# Altium PCB ATMEGA8精品开发板.PcbDoc (part 2 of 2)
Units mm, origin at the board's own origin, x right, y up, seen from the top; angles counter-clockwise.
Board outline 152.4 x 101.6 mm, 2 copper layers (Top Layer, Bottom Layer); 39 components, 43 nets, 177 pads, 0 vias.
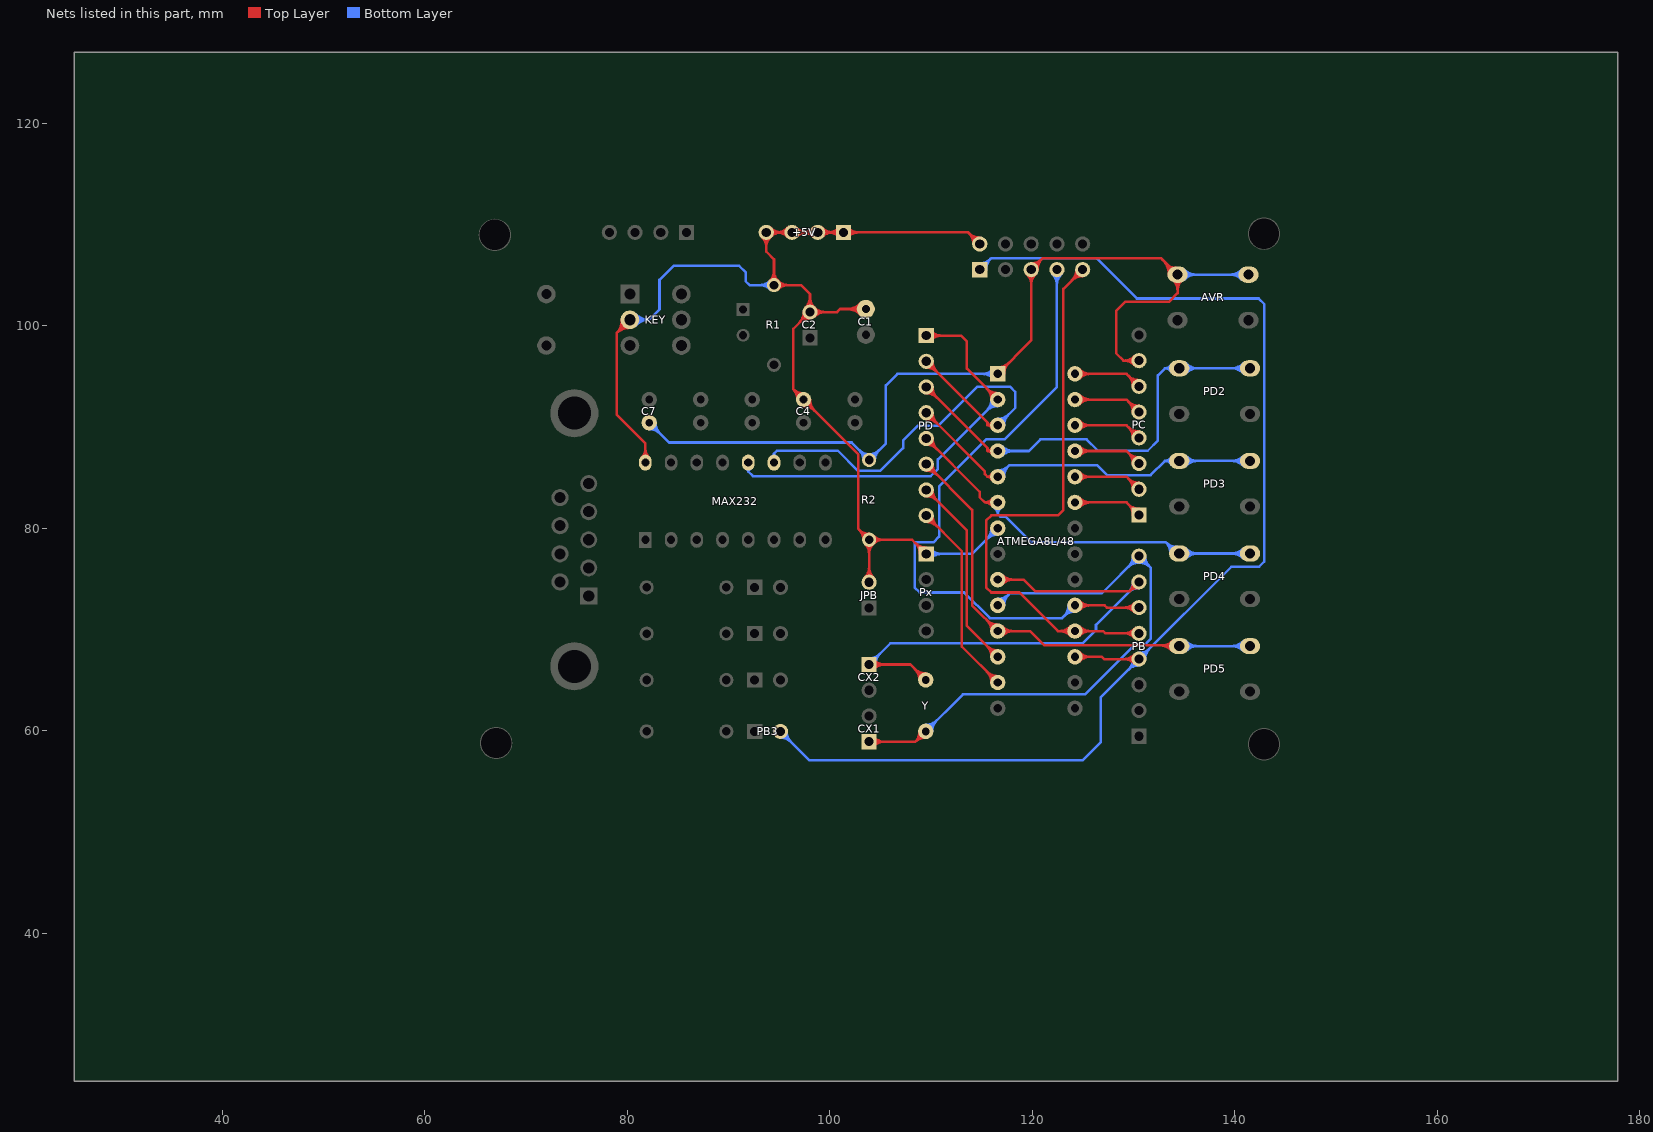
[diagram p2: the nets of this part, all layers, seen from the top]

## Nets (pads, with @x,y where several pads share a name; then routed paths per layer and width w, separated by ;. In a path a pad name is that pad's centre, name@x,y a point inside that pad or via, vN(x,y) a via of type N, cw(c..) or ccw(c..) an arc to the next point about the centre after c; other vN are vias at no path point) (continued)
PB3: ?.1 ATMEGA8L/48.17 PB3.2 PB.4 | length 144.7
  Top Layer w0.254: ATMEGA8L/48.17@124.206,67.31 126.873,67.31 127.096,67.087 PB.4@130.533,67.087 ; ATMEGA8L/48.17@124.475,67.041 cw(c125.126,66.39) 125.126,67.31 cw(c125.126,68.23) ATMEGA8L/48.17@124.475,67.579 ; ATMEGA8L/48.17@124.655,66.861 cw(c125.739,65.777) 125.739,67.31 cw(c125.739,68.843) ATMEGA8L/48.17@124.655,67.759 ; PB.4@130.092,66.646 ccw(c129.029,65.583) 129.029,67.087 ccw(c129.029,68.591) PB.4@130.092,67.528 ; PB.4@130.272,66.826 ccw(c129.642,66.196) 129.642,67.087 ccw(c129.642,67.978) PB.4@130.272,67.348
  Bottom Layer w0.254: PB3.2@95.123,59.321 cw(c95.123,57.817) 96.187,58.88 cw(c97.25,59.944) PB3.2@95.746,59.944 ; PB3.2@95.123,59.575 cw(c95.123,58.684) 95.753,59.314 cw(c96.383,59.944) PB3.2@95.492,59.944 ; PB3.2@95.123,59.944 97.993,57.074 124.968,57.074 126.746,58.852 126.746,63.3 PB.4@130.533,67.087 139.646,76.2 142.392,76.2 142.9,76.708 142.9,102.133 142.342,102.692 130.327,102.692 126.34,106.68 115.951,106.68 ?.1@114.808,105.537 ; ?.1@114.808,105.906 ccw(c114.808,106.797) 115.438,106.167 ccw(c116.068,105.537) ?.1@115.177,105.537 ; ?.1@114.808,106.16 ccw(c114.808,107.664) 115.872,106.601 ccw(c116.935,105.537) ?.1@115.431,105.537 ; PB.4@129.91,67.087 cw(c128.406,67.087) 129.469,66.023 cw(c130.533,64.96) PB.4@130.533,66.464 ; PB.4@130.164,67.087 cw(c129.273,67.087) 129.903,66.457 cw(c130.533,65.827) PB.4@130.533,66.718 ; PB.4@130.533,67.456 ccw(c130.533,68.347) 131.163,67.717 ccw(c131.793,67.087) PB.4@130.902,67.087 ; PB.4@130.533,67.71 ccw(c130.533,69.214) 131.597,68.151 ccw(c132.66,67.087) PB.4@131.156,67.087
PB4: ?.9 ATMEGA8L/48.18 PB.5 | length 71.4
  Top Layer w0.254: ATMEGA8L/48.18@123.757,69.401 ccw(c122.673,68.317) 122.673,69.85 ccw(c122.673,71.383) ATMEGA8L/48.18@123.757,70.299 ; ATMEGA8L/48.18@123.937,69.581 ccw(c123.286,68.93) 123.286,69.85 ccw(c123.286,70.77) ATMEGA8L/48.18@123.937,70.119 ; ?.9@124.345,105.537 cw(c122.841,105.537) 123.904,104.473 cw(c124.968,103.41) ?.9@124.968,104.914 ; ATMEGA8L/48.18@124.475,69.581 cw(c125.126,68.93) 125.126,69.85 cw(c125.126,70.77) ATMEGA8L/48.18@124.475,70.119 ; ?.9@124.599,105.537 cw(c123.708,105.537) 124.338,104.907 cw(c124.968,104.277) ?.9@124.968,105.168 ; ATMEGA8L/48.18@124.655,69.401 cw(c125.739,68.317) 125.739,69.85 cw(c125.739,71.383) ATMEGA8L/48.18@124.655,70.299 ; ?.9@124.968,105.537 123.063,103.632 123.063,81.788 122.555,81.28 115.951,81.28 115.443,80.772 115.443,74.168 115.951,73.66 118.72,73.66 122.53,69.85 ATMEGA8L/48.18@124.206,69.85 127,69.85 127.223,69.627 PB.5@130.533,69.627 ; PB.5@130.092,69.186 ccw(c129.029,68.123) 129.029,69.627 ccw(c129.029,71.131) PB.5@130.092,70.068 ; PB.5@130.272,69.366 ccw(c129.642,68.736) 129.642,69.627 ccw(c129.642,70.518) PB.5@130.272,69.888
PB5: ?.7 ATMEGA8L/48.19 PB.6 | length 78.6
  Top Layer w0.254: ATMEGA8L/48.19@124.206,72.39 127.127,72.39 127.35,72.167 PB.6@130.533,72.167 ; ATMEGA8L/48.19@124.475,72.121 cw(c125.126,71.47) 125.126,72.39 cw(c125.126,73.31) ATMEGA8L/48.19@124.475,72.659 ; ATMEGA8L/48.19@124.655,71.941 cw(c125.739,70.857) 125.739,72.39 cw(c125.739,73.923) ATMEGA8L/48.19@124.655,72.839 ; PB.6@130.092,71.726 ccw(c129.029,70.663) 129.029,72.167 ccw(c129.029,73.671) PB.6@130.092,72.608 ; PB.6@130.272,71.906 ccw(c129.642,71.276) 129.642,72.167 ccw(c129.642,73.058) PB.6@130.272,72.428
  Bottom Layer w0.254: ?.7@121.987,105.096 cw(c120.924,104.033) 122.428,104.033 cw(c123.932,104.033) ?.7@122.869,105.096 ; ?.7@122.167,105.276 cw(c121.537,104.646) 122.428,104.646 cw(c123.319,104.646) ?.7@122.689,105.276 ; ?.7@122.428,105.537 122.428,93.955 117.246,88.773 115.443,88.773 110.795,84.125 110.795,79.172 110.236,78.613 108.382,78.613 108.382,74.168 108.89,73.66 113.259,73.66 115.799,71.12 122.936,71.12 ATMEGA8L/48.19@124.206,72.39 ; ATMEGA8L/48.19@123.571,72.39 cw(c122.038,72.39) 123.122,71.306 cw(c124.206,70.222) ATMEGA8L/48.19@124.206,71.755 ; ATMEGA8L/48.19@123.825,72.39 cw(c122.905,72.39) 123.556,71.74 cw(c124.206,71.089) ATMEGA8L/48.19@124.206,72.009
PB6: ATMEGA8L/48.9 CX2.1 PB.7 Y.2 | length 73.3
  Top Layer w0.254: CX2.1@103.886,66.548 107.95,66.548 Y.2@109.474,65.024 ; CX2.1@104.147,66.287 cw(c104.777,65.657) 104.777,66.548 cw(c104.777,67.439) CX2.1@104.147,66.809 ; CX2.1@104.327,66.107 cw(c105.39,65.044) 105.39,66.548 cw(c105.39,68.052) CX2.1@104.327,66.989 ; Y.2@108.839,65.024 ccw(c107.306,65.024) 108.39,66.108 ccw(c109.474,67.192) Y.2@109.474,65.659 ; Y.2@109.093,65.024 ccw(c108.173,65.024) 108.824,65.674 ccw(c109.474,66.325) Y.2@109.474,65.405 ; ATMEGA8L/48.9@116.586,74.93 119.126,74.93 120.269,73.787 129.613,73.787 PB.7@130.533,74.707 ; ATMEGA8L/48.9@116.855,74.661 cw(c117.506,74.01) 117.506,74.93 cw(c117.506,75.85) ATMEGA8L/48.9@116.855,75.199 ; ATMEGA8L/48.9@117.035,74.481 cw(c118.119,73.397) 118.119,74.93 cw(c118.119,76.463) ATMEGA8L/48.9@117.035,75.379 ; PB.7@129.914,74.64 cw(c128.873,74.527) 129.613,73.787 cw(c130.353,73.047) PB.7@130.466,74.088 ; PB.7@130.166,74.667 cw(c129.55,74.601) 129.988,74.162 cw(c130.427,73.724) PB.7@130.493,74.34
  Bottom Layer w0.254: CX2.1@103.886,66.548 105.969,68.631 124.968,68.631 126.289,69.952 126.289,70.463 PB.7@130.533,74.707 ; CX2.1@103.886,66.917 ccw(c103.886,67.808) 104.516,67.178 ccw(c105.146,66.548) CX2.1@104.255,66.548 ; CX2.1@103.886,67.171 ccw(c103.886,68.675) 104.95,67.612 ccw(c106.013,66.548) CX2.1@104.509,66.548 ; PB.7@129.91,74.707 cw(c128.406,74.707) 129.469,73.643 cw(c130.533,72.58) PB.7@130.533,74.084 ; PB.7@130.164,74.707 cw(c129.273,74.707) 129.903,74.077 cw(c130.533,73.447) PB.7@130.533,74.338
PB7: ATMEGA8L/48.10 CX1.1 PB.8 Y.1 | length 79.1
  Top Layer w0.254: CX1.1@103.886,58.928 108.458,58.928 ; CX1.1@104.147,58.667 cw(c104.777,58.037) 104.777,58.928 cw(c104.777,59.819) CX1.1@104.147,59.189 ; CX1.1@104.327,58.487 cw(c105.39,57.424) 105.39,58.928 cw(c105.39,60.432) CX1.1@104.327,59.369 ; Y.1@108.84,59.914 cw(c107.533,59.853) 108.458,58.928 ; Y.1@109.093,59.926 cw(c108.31,59.889) 108.864,59.334 cw(c109.419,58.78) Y.1@109.456,59.563 ; Y.1@109.444,59.31 ccw(c109.383,58.003) 108.458,58.928 ; Y.1@109.474,59.944 108.458,58.928
  Bottom Layer w0.254: Y.1@109.474,59.944 113.132,63.602 125.197,63.602 130.073,68.478 131.064,68.478 131.674,69.088 131.674,76.106 PB.8@130.533,77.247 126.87,73.584 117.78,73.584 ATMEGA8L/48.10@116.586,72.39 ; Y.1@109.474,60.325 ccw(c109.474,61.245) 110.124,60.594 ccw(c110.775,59.944) Y.1@109.855,59.944 ; Y.1@109.474,60.579 ccw(c109.474,62.112) 110.558,61.028 ccw(c111.642,59.944) Y.1@110.109,59.944 ; ATMEGA8L/48.10@116.586,72.771 ccw(c116.586,73.691) 117.236,73.04 ccw(c117.887,72.39) ATMEGA8L/48.10@116.967,72.39 ; ATMEGA8L/48.10@116.586,73.025 ccw(c116.586,74.558) 117.67,73.474 ccw(c118.754,72.39) ATMEGA8L/48.10@117.221,72.39 ; PB.8@129.91,77.247 cw(c128.406,77.247) 129.469,76.183 cw(c130.533,75.12) 130.533,76.624 cw(c130.533,75.12) 131.597,76.183 cw(c132.66,77.247) PB.8@131.156,77.247 ; PB.8@130.164,77.247 cw(c129.273,77.247) 129.903,76.617 cw(c130.533,75.987) 130.533,76.878 cw(c130.533,75.987) 131.163,76.617 cw(c131.793,77.247) PB.8@130.902,77.247
PC0: ATMEGA8L/48.23 PC.1 | length 14.5
  Top Layer w0.254: ATMEGA8L/48.23@124.206,82.55 129.294,82.55 PC.1@130.533,81.311 ; ATMEGA8L/48.23@124.475,82.281 cw(c125.126,81.63) 125.126,82.55 cw(c125.126,83.47) ATMEGA8L/48.23@124.475,82.819 ; ATMEGA8L/48.23@124.655,82.101 cw(c125.739,81.017) 125.739,82.55 cw(c125.739,84.083) ATMEGA8L/48.23@124.655,82.999 ; PC.1@129.91,81.311 ccw(c128.406,81.311) 129.469,82.375 ccw(c130.533,83.438) PC.1@130.533,81.934 ; PC.1@130.164,81.311 ccw(c129.273,81.311) 129.903,81.941 ccw(c130.533,82.571) PC.1@130.533,81.68
PC1: ATMEGA8L/48.24 PC.2 | length 14.5
  Top Layer w0.254: ATMEGA8L/48.24@124.206,85.09 129.294,85.09 PC.2@130.533,83.851 ; ATMEGA8L/48.24@124.475,84.821 cw(c125.126,84.17) 125.126,85.09 cw(c125.126,86.01) ATMEGA8L/48.24@124.475,85.359 ; ATMEGA8L/48.24@124.655,84.641 cw(c125.739,83.557) 125.739,85.09 cw(c125.739,86.623) ATMEGA8L/48.24@124.655,85.539 ; PC.2@129.91,83.851 ccw(c128.406,83.851) 129.469,84.915 ccw(c130.533,85.978) PC.2@130.533,84.474 ; PC.2@130.164,83.851 ccw(c129.273,83.851) 129.903,84.481 ccw(c130.533,85.111) PC.2@130.533,84.22
PC2: ATMEGA8L/48.25 PC.3 | length 14.5
  Top Layer w0.254: ATMEGA8L/48.25@124.206,87.63 129.294,87.63 PC.3@130.533,86.391 ; ATMEGA8L/48.25@124.475,87.361 cw(c125.126,86.71) 125.126,87.63 cw(c125.126,88.55) ATMEGA8L/48.25@124.475,87.899 ; ATMEGA8L/48.25@124.655,87.181 cw(c125.739,86.097) 125.739,87.63 cw(c125.739,89.163) ATMEGA8L/48.25@124.655,88.079 ; PC.3@129.91,86.391 ccw(c128.406,86.391) 129.469,87.455 ccw(c130.533,88.518) PC.3@130.533,87.014 ; PC.3@130.164,86.391 ccw(c129.273,86.391) 129.903,87.021 ccw(c130.533,87.651) PC.3@130.533,86.76
PC3: ATMEGA8L/48.26 PC.4 | length 14.5
  Top Layer w0.254: ATMEGA8L/48.26@124.206,90.17 129.294,90.17 PC.4@130.533,88.931 ; ATMEGA8L/48.26@124.475,89.901 cw(c125.126,89.25) 125.126,90.17 cw(c125.126,91.09) ATMEGA8L/48.26@124.475,90.439 ; ATMEGA8L/48.26@124.655,89.721 cw(c125.739,88.637) 125.739,90.17 cw(c125.739,91.703) ATMEGA8L/48.26@124.655,90.619 ; PC.4@129.91,88.931 ccw(c128.406,88.931) 129.469,89.995 ccw(c130.533,91.058) PC.4@130.533,89.554 ; PC.4@130.164,88.931 ccw(c129.273,88.931) 129.903,89.561 ccw(c130.533,90.191) PC.4@130.533,89.3
PC4: ATMEGA8L/48.27 PC.5 | length 14.5
  Top Layer w0.254: ATMEGA8L/48.27@124.206,92.71 129.294,92.71 PC.5@130.533,91.471 ; ATMEGA8L/48.27@124.475,92.441 cw(c125.126,91.79) 125.126,92.71 cw(c125.126,93.63) ATMEGA8L/48.27@124.475,92.979 ; ATMEGA8L/48.27@124.655,92.261 cw(c125.739,91.177) 125.739,92.71 cw(c125.739,94.243) ATMEGA8L/48.27@124.655,93.159 ; PC.5@129.91,91.471 ccw(c128.406,91.471) 129.469,92.535 ccw(c130.533,93.598) PC.5@130.533,92.094 ; PC.5@130.164,91.471 ccw(c129.273,91.471) 129.903,92.101 ccw(c130.533,92.731) PC.5@130.533,91.84
PC5: ATMEGA8L/48.28 PC.6 | length 14.5
  Top Layer w0.254: ATMEGA8L/48.28@124.206,95.25 129.294,95.25 PC.6@130.533,94.011 ; ATMEGA8L/48.28@124.475,94.981 cw(c125.126,94.33) 125.126,95.25 cw(c125.126,96.17) ATMEGA8L/48.28@124.475,95.519 ; ATMEGA8L/48.28@124.655,94.801 cw(c125.739,93.717) 125.739,95.25 cw(c125.739,96.783) ATMEGA8L/48.28@124.655,95.699 ; PC.6@129.91,94.011 ccw(c128.406,94.011) 129.469,95.075 ccw(c130.533,96.138) PC.6@130.533,94.634 ; PC.6@130.164,94.011 ccw(c129.273,94.011) 129.903,94.641 ccw(c130.533,95.271) PC.6@130.533,94.38
PC6: ?.5 ATMEGA8L/48.1 AVR.1 C7.1 PC.7 R2.1 | length 138.2
  Top Layer w0.254: ATMEGA8L/48.1@116.586,95.25 119.888,98.552 ?.5@119.888,105.537 121.031,106.68 132.707,106.68 AVR.1@134.343,105.044 134.343,103.228 133.477,102.362 129.159,102.362 128.27,101.473 128.27,97.282 129.001,96.551 PC.7@130.533,96.551 ; ATMEGA8L/48.1@116.586,95.631 ccw(c116.586,96.551) 117.236,95.9 ccw(c117.887,95.25) ATMEGA8L/48.1@116.967,95.25 ; ATMEGA8L/48.1@116.586,95.885 ccw(c116.586,97.418) 117.67,96.334 ccw(c118.754,95.25) ATMEGA8L/48.1@117.221,95.25 ; ?.5@119.447,105.096 cw(c118.384,104.033) 119.888,104.033 cw(c121.392,104.033) ?.5@120.329,105.096 ; ?.5@119.627,105.276 cw(c118.997,104.646) 119.888,104.646 cw(c120.779,104.646) ?.5@120.149,105.276 ; ?.5@119.888,105.906 ccw(c119.888,106.797) 120.518,106.167 ccw(c121.148,105.537) ?.5@120.257,105.537 ; ?.5@119.888,106.16 ccw(c119.888,107.664) 120.952,106.601 ccw(c122.015,105.537) ?.5@120.511,105.537 ; PC.7@130.092,96.11 ccw(c129.029,95.047) 129.029,96.551 ccw(c129.029,98.055) PC.7@130.092,96.992 ; PC.7@130.272,96.29 ccw(c129.642,95.66) 129.642,96.551 ccw(c129.642,97.442) PC.7@130.272,96.812 ; 132.853,106.534 cw(c131.362,105.044) AVR.1@133.47,105.044 ; 133.286,106.1 cw(c132.23,105.044) AVR.1@133.724,105.044 ; 133.336,106.051 ccw(c134.143,106.859) AVR.1@134.143,105.717 ; AVR.1@133.867,104.568 cw(c132.718,103.419) 134.343,103.419 cw(c135.968,103.419) AVR.1@134.819,104.568 ; AVR.1@134.047,104.748 cw(c133.331,104.032) 134.343,104.032 cw(c135.355,104.032) AVR.1@134.639,104.748
  Bottom Layer w0.254: C7.1@82.169,89.789 cw(c82.169,88.256) 83.253,89.34 cw(c84.337,90.424) C7.1@82.804,90.424 ; C7.1@82.169,90.043 cw(c82.169,89.123) 82.819,89.774 cw(c83.47,90.424) C7.1@82.55,90.424 ; C7.1@82.169,90.424 84.125,88.468 102.159,88.468 R2.1@103.886,86.741 105.537,88.392 105.537,94.107 106.68,95.25 ATMEGA8L/48.1@116.586,95.25 ; R2.1@103.313,86.741 ccw(c101.93,86.741) 102.908,87.719 ccw(c103.886,88.697) 103.886,87.314 ccw(c103.886,88.697) 104.864,87.719 ccw(c105.842,86.741) R2.1@104.459,86.741 ; R2.1@103.567,86.741 ccw(c102.797,86.741) 103.341,87.286 ccw(c103.886,87.83) 103.886,87.06 ccw(c103.886,87.83) 104.431,87.286 ccw(c104.975,86.741) R2.1@104.205,86.741 ; ATMEGA8L/48.1@116.137,94.801 ccw(c115.053,93.717) 115.053,95.25 ccw(c115.053,96.783) ATMEGA8L/48.1@116.137,95.699 ; ATMEGA8L/48.1@116.317,94.981 ccw(c115.666,94.33) 115.666,95.25 ccw(c115.666,96.17) ATMEGA8L/48.1@116.317,95.519 ; AVR.1@134.343,105.044 AVR.1@141.343,105.044 ; AVR.1@134.839,104.748 cw(c135.555,104.032) 135.555,105.044 cw(c135.555,106.055) AVR.1@134.839,105.34 ; AVR.1@135.019,104.568 cw(c136.168,103.419) 136.168,105.044 cw(c136.168,106.669) AVR.1@135.019,105.52 ; AVR.1@140.667,104.568 ccw(c139.518,103.419) 139.518,105.044 ccw(c139.518,106.669) AVR.1@140.667,105.52 ; AVR.1@140.847,104.748 ccw(c140.131,104.032) 140.131,105.044 ccw(c140.131,106.055) AVR.1@140.847,105.34
PD0: ATMEGA8L/48.2 MAX232.12 PD.1 | length 53.4
  Top Layer w0.254: PD.1@109.526,99.029 112.934,99.029 113.538,98.425 113.538,95.758 ATMEGA8L/48.2@116.586,92.71 ; PD.1@109.787,98.768 cw(c110.417,98.138) 110.417,99.029 cw(c110.417,99.92) PD.1@109.787,99.29 ; PD.1@109.967,98.588 cw(c111.03,97.525) 111.03,99.029 cw(c111.03,100.533) PD.1@109.967,99.47 ; ATMEGA8L/48.2@115.951,92.71 ccw(c114.418,92.71) 115.502,93.794 ccw(c116.586,94.878) ATMEGA8L/48.2@116.586,93.345 ; ATMEGA8L/48.2@116.205,92.71 ccw(c115.285,92.71) 115.936,93.36 ccw(c116.586,94.011) ATMEGA8L/48.2@116.586,93.091
  Bottom Layer w0.254: MAX232.12@91.949,86.483 91.949,85.598 ; ATMEGA8L/48.2@115.951,92.71 cw(c114.418,92.71) 115.502,91.626 cw(c116.586,90.542) ATMEGA8L/48.2@116.586,92.075 ; ATMEGA8L/48.2@116.205,92.71 cw(c115.285,92.71) 115.936,92.06 cw(c116.586,91.409) ATMEGA8L/48.2@116.586,92.329 ; ATMEGA8L/48.2@116.586,92.71 110.668,86.792 110.668,85.852 109.968,85.152 92.395,85.152 91.949,85.598 ; 91.949,85.598 cw(c92.224,85.598) 92.126,85.855 ccw(c92.224,85.598) 91.949,85.598 ; 91.949,85.598 ccw(c91.674,85.598) 91.772,85.855 cw(c91.674,85.598) 91.949,85.598
PD1: ATMEGA8L/48.3 MAX232.11 PD.2 | length 53
  Top Layer w0.254: PD.2@109.526,95.866 cw(c109.526,94.362) 110.59,95.425 cw(c111.653,96.489) PD.2@110.149,96.489 ; PD.2@109.526,96.12 cw(c109.526,95.229) 110.156,95.859 cw(c110.786,96.489) PD.2@109.895,96.489 ; PD.2@109.526,96.489 115.57,90.445 115.57,90.17 ; ATMEGA8L/48.3@116.015,89.892 ccw(c115.57,89.675) 115.57,90.17 ; ATMEGA8L/48.3@116.015,90.448 cw(c115.57,90.665) 115.57,90.17 ; ATMEGA8L/48.3@116.586,90.17 115.57,90.17
  Bottom Layer w0.254: MAX232.11@94.307,87.109 ccw(c94.202,87.376) 94.489,87.376 ; MAX232.11@94.489,86.483 94.489,87.376 ; MAX232.11@94.671,87.109 cw(c94.776,87.376) 94.489,87.376 ; ATMEGA8L/48.3@116.586,90.17 118.313,91.897 118.313,93.472 117.805,93.98 114.579,93.98 110.744,90.145 108.712,90.145 107.239,88.671 107.239,87.921 104.978,85.66 102.794,85.66 100.798,87.655 94.768,87.655 94.489,87.376 ; ATMEGA8L/48.3@116.586,90.551 ccw(c116.586,91.471) 117.236,90.82 ccw(c117.887,90.17) ATMEGA8L/48.3@116.967,90.17 ; ATMEGA8L/48.3@116.586,90.805 ccw(c116.586,92.338) 117.67,91.254 ccw(c118.754,90.17) ATMEGA8L/48.3@117.221,90.17
PD2: ATMEGA8L/48.4 PD2.2 PD.3 | length 61.4
  Top Layer w0.254: PD.3@109.526,93.326 cw(c109.526,91.822) 110.59,92.885 cw(c111.653,93.949) PD.3@110.149,93.949 ; PD.3@109.526,93.58 cw(c109.526,92.689) 110.156,93.319 cw(c110.786,93.949) PD.3@109.895,93.949 ; PD.3@109.526,93.949 115.57,87.905 115.57,87.63 ; ATMEGA8L/48.4@116.015,87.352 ccw(c115.57,87.135) 115.57,87.63 ; ATMEGA8L/48.4@116.015,87.908 cw(c115.57,88.125) 115.57,87.63 ; ATMEGA8L/48.4@116.586,87.63 115.57,87.63
  Bottom Layer w0.254: ATMEGA8L/48.4@116.586,87.63 119.659,87.63 120.802,88.773 125.349,88.773 126.467,87.655 131.394,87.655 132.385,88.646 132.385,95.087 133.096,95.798 ; ATMEGA8L/48.4@116.855,87.361 cw(c117.506,86.71) 117.506,87.63 cw(c117.506,88.55) ATMEGA8L/48.4@116.855,87.899 ; ATMEGA8L/48.4@117.035,87.181 cw(c118.119,86.097) 118.119,87.63 cw(c118.119,89.163) ATMEGA8L/48.4@117.035,88.079 ; PD2.2@133.728,95.445 ccw(c133.096,95.056) 133.096,95.798 ; PD2.2@133.728,96.151 cw(c133.096,96.54) 133.096,95.798 ; PD2.2@134.997,95.502 cw(c135.713,94.787) 135.713,95.798 cw(c135.713,96.81) PD2.2@134.997,96.094 ; PD2.2@135.177,95.322 cw(c136.326,94.173) 136.326,95.798 cw(c136.326,97.423) PD2.2@135.177,96.274 ; PD2.2@140.825,95.322 ccw(c139.676,94.173) 139.676,95.798 ccw(c139.676,97.423) PD2.2@140.825,96.274 ; PD2.2@141.005,95.502 ccw(c140.289,94.787) 140.289,95.798 ccw(c140.289,96.81) PD2.2@141.005,96.094 ; PD2.2@141.501,95.798 PD2.2@134.501,95.798 133.096,95.798
PD3: ATMEGA8L/48.5 PD3.2 PD.4 | length 54.8
  Top Layer w0.254: PD.4@109.526,90.786 cw(c109.526,89.282) 110.59,90.345 cw(c111.653,91.409) PD.4@110.149,91.409 ; PD.4@109.526,91.04 cw(c109.526,90.149) 110.156,90.779 cw(c110.786,91.409) PD.4@109.895,91.409 ; PD.4@109.526,91.409 115.316,85.619 115.316,85.344 115.57,85.09 ; ATMEGA8L/48.5@116.015,84.812 ccw(c115.57,84.595) 115.57,85.09 ; ATMEGA8L/48.5@116.015,85.368 cw(c115.57,85.585) 115.57,85.09 ; ATMEGA8L/48.5@116.586,85.09 115.57,85.09
  Bottom Layer w0.254: ATMEGA8L/48.5@116.586,85.09 117.729,86.233 126.39,86.233 127.381,85.242 131.674,85.242 133.085,86.654 ; ATMEGA8L/48.5@116.586,85.471 ccw(c116.586,86.391) 117.236,85.74 ccw(c117.887,85.09) ATMEGA8L/48.5@116.967,85.09 ; ATMEGA8L/48.5@116.586,85.725 ccw(c116.586,87.258) 117.67,86.174 ccw(c118.754,85.09) ATMEGA8L/48.5@117.221,85.09 ; PD3.2@133.731,86.297 ccw(c133.085,85.893) 133.085,86.654 ; PD3.2@133.731,87.011 cw(c133.085,87.416) 133.085,86.654 ; PD3.2@134.997,86.358 cw(c135.713,85.643) 135.713,86.654 cw(c135.713,87.666) PD3.2@134.997,86.95 ; PD3.2@135.177,86.178 cw(c136.326,85.029) 136.326,86.654 cw(c136.326,88.279) PD3.2@135.177,87.13 ; PD3.2@140.825,86.178 ccw(c139.676,85.029) 139.676,86.654 ccw(c139.676,88.279) PD3.2@140.825,87.13 ; PD3.2@141.005,86.358 ccw(c140.289,85.643) 140.289,86.654 ccw(c140.289,87.666) PD3.2@141.005,86.95 ; PD3.2@141.501,86.654 PD3.2@134.501,86.654 133.085,86.654
PD4: ATMEGA8L/48.6 PD4.2 PD.5 | length 56.9
  Top Layer w0.254: PD.5@109.526,88.246 cw(c109.526,86.742) 110.59,87.805 cw(c111.653,88.869) PD.5@110.149,88.869 ; PD.5@109.526,88.5 cw(c109.526,87.609) 110.156,88.239 cw(c110.786,88.869) PD.5@109.895,88.869 ; PD.5@109.526,88.869 114.808,83.587 114.808,83.058 115.316,82.55 ; ATMEGA8L/48.6@116.078,82.169 ccw(c115.316,81.598) 115.316,82.55 ; ATMEGA8L/48.6@116.078,82.931 cw(c115.316,83.502) 115.316,82.55 ; ATMEGA8L/48.6@116.586,82.55 115.316,82.55
  Bottom Layer w0.254: ATMEGA8L/48.6@116.251,82.011 cw(c115.875,81.407) 116.586,81.407 ; ATMEGA8L/48.6@116.586,82.55 116.586,81.407 ; ATMEGA8L/48.6@116.921,82.011 ccw(c117.297,81.407) 116.586,81.407 ; 133.588,78.212 ccw(c134.271,78.895) PD4.2@134.292,77.929 ; 133.598,78.202 cw(c132.913,77.516) PD4.2@133.882,77.512 ; PD4.2@133.628,77.513 ccw(c132.055,77.52) 133.167,78.633 ccw(c134.254,79.719) PD4.2@134.287,78.183 ; PD4.2@134.997,77.214 cw(c135.713,76.499) 135.713,77.51 cw(c135.713,78.522) PD4.2@134.997,77.806 ; PD4.2@135.177,77.034 cw(c136.326,75.885) 136.326,77.51 cw(c136.326,79.135) PD4.2@135.177,77.986 ; PD4.2@140.825,77.034 ccw(c139.676,75.885) 139.676,77.51 ccw(c139.676,79.135) PD4.2@140.825,77.986 ; PD4.2@141.005,77.214 ccw(c140.289,76.499) 140.289,77.51 ccw(c140.289,78.522) PD4.2@141.005,77.806 ; PD4.2@141.501,77.51 PD4.2@134.501,77.51 134.29,77.51 133.162,78.638 119.863,78.638 117.348,81.153 116.84,81.153 116.586,81.407
PD5: ATMEGA8L/48.11 PD5.2 PD.6 | length 68.8
  Top Layer w0.254: PD.6@109.526,85.706 cw(c109.526,84.202) 110.59,85.265 cw(c111.653,86.329) PD.6@110.149,86.329 ; PD.6@109.526,85.96 cw(c109.526,85.069) 110.156,85.699 cw(c110.786,86.329) PD.6@109.895,86.329 ; PD.6@109.526,86.329 114.046,81.809 114.046,72.39 ATMEGA8L/48.11@116.586,69.85 119.761,69.85 121.158,68.453 134.414,68.453 PD5.2@134.501,68.366 ; ATMEGA8L/48.11@115.951,69.85 ccw(c114.418,69.85) 115.502,70.934 ccw(c116.586,72.018) ATMEGA8L/48.11@116.586,70.485 ; ATMEGA8L/48.11@116.205,69.85 ccw(c115.285,69.85) 115.936,70.5 ccw(c116.586,71.151) ATMEGA8L/48.11@116.586,70.231 ; ATMEGA8L/48.11@116.855,69.581 cw(c117.506,68.93) 117.506,69.85 cw(c117.506,70.77) ATMEGA8L/48.11@116.855,70.119 ; ATMEGA8L/48.11@117.035,69.401 cw(c118.119,68.317) 118.119,69.85 cw(c118.119,71.383) ATMEGA8L/48.11@117.035,70.299 ; 132.467,68.453 cw(c132.467,66.532) PD5.2@133.825,67.89 ; 132.886,68.453 ccw(c132.886,69.781) PD5.2@133.825,68.842 ; 133.08,68.453 cw(c133.08,67.145) PD5.2@134.005,68.07 ; 133.499,68.453 ccw(c133.499,69.168) PD5.2@134.005,68.662
  Bottom Layer w0.254: PD5.2@134.501,68.366 PD5.2@141.501,68.366 ; PD5.2@134.997,68.07 cw(c135.713,67.355) 135.713,68.366 cw(c135.713,69.378) PD5.2@134.997,68.662 ; PD5.2@135.177,67.89 cw(c136.326,66.741) 136.326,68.366 cw(c136.326,69.991) PD5.2@135.177,68.842 ; PD5.2@140.825,67.89 ccw(c139.676,66.741) 139.676,68.366 ccw(c139.676,69.991) PD5.2@140.825,68.842 ; PD5.2@141.005,68.07 ccw(c140.289,67.355) 140.289,68.366 ccw(c140.289,69.378) PD5.2@141.005,68.662
PD6: ATMEGA8L/48.12 PD.7 | length 27
  Top Layer w0.254: PD.7@109.526,83.166 cw(c109.526,81.662) 110.59,82.725 cw(c111.653,83.789) PD.7@110.149,83.789 ; PD.7@109.526,83.42 cw(c109.526,82.529) 110.156,83.159 cw(c110.786,83.789) PD.7@109.895,83.789 ; PD.7@109.526,83.789 113.538,79.777 113.538,70.358 ATMEGA8L/48.12@116.586,67.31 ; ATMEGA8L/48.12@115.951,67.31 ccw(c114.418,67.31) 115.502,68.394 ccw(c116.586,69.478) ATMEGA8L/48.12@116.586,67.945 ; ATMEGA8L/48.12@116.205,67.31 ccw(c115.285,67.31) 115.936,67.96 ccw(c116.586,68.611) ATMEGA8L/48.12@116.586,67.691
PD7: ATMEGA8L/48.13 PD.8 | length 27
  Top Layer w0.254: PD.8@109.526,80.626 cw(c109.526,79.122) 110.59,80.185 cw(c111.653,81.249) PD.8@110.149,81.249 ; PD.8@109.526,80.88 cw(c109.526,79.989) 110.156,80.619 cw(c110.786,81.249) PD.8@109.895,81.249 ; PD.8@109.526,81.249 113.03,77.745 113.03,68.326 ATMEGA8L/48.13@116.586,64.77 ; ATMEGA8L/48.13@115.951,64.77 ccw(c114.418,64.77) 115.502,65.854 ccw(c116.586,66.938) ATMEGA8L/48.13@116.586,65.405 ; ATMEGA8L/48.13@116.205,64.77 ccw(c115.285,64.77) 115.936,65.42 ccw(c116.586,66.071) ATMEGA8L/48.13@116.586,65.151
VCC: +5V.1 +5V.2 +5V.3 +5V.4 ?.2 ATMEGA8L/48.7 C1.1 C2.2 C4.2 JPB.2 KEY.2 MAX232.16 Px.1 R1.1 R2.2 | length 222.9
  Top Layer w0.254: KEY.2@79.466,100.566 cw(c77.68,100.527) 78.943,99.263 ; KEY.2@79.72,100.572 cw(c78.502,100.545) 79.364,99.684 cw(c80.225,98.822) KEY.2@80.252,100.04 ; KEY.2@80.246,99.786 ccw(c80.207,98) 78.943,99.263 ; KEY.2@80.264,100.584 78.943,99.263 ; MAX232.16@81.437,86.998 ccw(c80.587,87.848) 81.789,87.848 ccw(c82.991,87.848) MAX232.16@82.141,86.998 ; MAX232.16@81.789,86.483 81.789,88.367 78.943,91.212 78.943,99.263 ; +5V.4@93.285,108.779 cw(c92.222,107.716) 93.726,107.716 cw(c95.23,107.716) 94.167,108.779 cw(c95.23,107.716) 95.23,109.22 cw(c95.23,110.724) +5V.4@94.167,109.661 ; +5V.4@93.465,108.959 cw(c92.835,108.329) 93.726,108.329 cw(c94.617,108.329) 93.987,108.959 cw(c94.617,108.329) 94.617,109.22 cw(c94.617,110.111) +5V.4@93.987,109.481 ; R1.1@94.083,104.418 ccw(c93.105,105.396) 94.488,105.396 ccw(c95.871,105.396) 94.893,104.418 ccw(c95.871,105.396) 95.871,104.013 ccw(c95.871,102.63) R1.1@94.893,103.608 ; R1.1@94.262,104.239 ccw(c93.718,104.783) 94.488,104.783 ccw(c95.258,104.783) 94.714,104.239 ccw(c95.258,104.783) 95.258,104.013 ccw(c95.258,103.243) R1.1@94.714,103.787 ; +5V.3@95.825,108.779 ccw(c94.762,107.716) 94.762,109.22 ccw(c94.762,110.724) +5V.3@95.825,109.661 ; +5V.3@96.005,108.959 ccw(c95.375,108.329) 95.375,109.22 ccw(c95.375,110.111) +5V.3@96.005,109.481 ; +5V.3@96.527,108.959 cw(c97.157,108.329) 97.157,109.22 cw(c97.157,110.111) +5V.3@96.527,109.481 ; +5V.3@96.707,108.779 cw(c97.77,107.716) 97.77,109.22 cw(c97.77,110.724) +5V.3@96.707,109.661 ; C4.2@96.775,92.74 ccw(c95.468,92.801) 96.393,93.726 ; C4.2@97.028,92.728 ccw(c96.245,92.765) 96.799,93.32 ccw(c97.354,93.874) C4.2@97.391,93.091 ; C4.2@97.379,93.344 cw(c97.318,94.651) 96.393,93.726 ; C4.2@97.409,92.075 cw(c97.409,90.542) 98.493,91.626 cw(c99.577,92.71) C4.2@98.044,92.71 ; C4.2@97.409,92.329 cw(c97.409,91.409) 98.059,92.06 cw(c98.71,92.71) C4.2@97.79,92.71 ; C2.2@97.421,101.346 cw(c95.917,101.346) 96.98,100.282 cw(c98.044,99.219) C2.2@98.044,100.723 ; C2.2@97.603,101.787 ccw(c96.54,102.85) 98.044,102.85 ccw(c99.548,102.85) 98.485,101.787 ccw(c99.548,102.85) 99.548,101.346 ccw(c99.548,99.842) C2.2@98.485,100.905 ; C2.2@97.675,101.346 cw(c96.784,101.346) 97.414,100.716 cw(c98.044,100.086) C2.2@98.044,100.977 ; C2.2@97.783,101.607 ccw(c97.153,102.237) 98.044,102.237 ccw(c98.935,102.237) 98.305,101.607 ccw(c98.935,102.237) 98.935,101.346 ccw(c98.935,100.455) C2.2@98.305,101.085 ; +5V.2@98.365,108.779 ccw(c97.302,107.716) 97.302,109.22 ccw(c97.302,110.724) +5V.2@98.365,109.661 ; +5V.2@98.545,108.959 ccw(c97.915,108.329) 97.915,109.22 ccw(c97.915,110.111) +5V.2@98.545,109.481 ; +5V.2@99.067,108.959 cw(c99.697,108.329) 99.697,109.22 cw(c99.697,110.111) +5V.2@99.067,109.481 ; +5V.2@99.247,108.779 cw(c100.31,107.716) 100.31,109.22 cw(c100.31,110.724) +5V.2@99.247,109.661 ; +5V.1@100.905,108.779 ccw(c99.842,107.716) 99.842,109.22 ccw(c99.842,110.724) +5V.1@100.905,109.661 ; +5V.1@101.085,108.959 ccw(c100.455,108.329) 100.455,109.22 ccw(c100.455,110.111) +5V.1@101.085,109.481 ; +5V.1@101.607,108.959 cw(c102.237,108.329) 102.237,109.22 cw(c102.237,110.111) +5V.1@101.607,109.481 ; +5V.1@101.787,108.779 cw(c102.85,107.716) 102.85,109.22 cw(c102.85,110.724) +5V.1@101.787,109.661 ; C1.1@103.009,101.104 ccw(c101.69,99.785) 101.69,101.651 ccw(c101.69,103.517) C1.1@103.009,102.197 ; C1.1@103.189,101.284 ccw(c102.303,100.398) 102.303,101.651 ccw(c102.303,102.904) C1.1@103.189,102.018 ; R2.2@103.313,78.867 ccw(c101.93,78.867) 102.908,79.845 ccw(c103.886,80.823) R2.2@103.886,79.44 ; JPB.2@103.445,75.117 ccw(c102.382,76.18) 103.886,76.18 ccw(c105.39,76.18) JPB.2@104.327,75.117 ; R2.2@103.481,78.462 cw(c102.503,77.484) 103.886,77.484 cw(c105.269,77.484) 104.291,78.462 cw(c105.269,77.484) 105.269,78.867 cw(c105.269,80.25) R2.2@104.291,79.272 ; C1.1@103.556,101.651 101.016,101.651 100.711,101.346 C2.2@98.044,101.346 ; R2.2@103.567,78.867 ccw(c102.797,78.867) 103.341,79.412 ccw(c103.886,79.956) R2.2@103.886,79.186 ; JPB.2@103.625,74.937 ccw(c102.995,75.567) 103.886,75.567 ccw(c104.777,75.567) JPB.2@104.147,74.937 ; R2.2@103.66,78.641 cw(c103.116,78.097) 103.886,78.097 cw(c104.656,78.097) 104.112,78.641 cw(c104.656,78.097) 104.656,78.867 cw(c104.656,79.637) R2.2@104.112,79.093 ; JPB.2@103.886,74.676 R2.2@103.886,78.867 ; Px.1@108.903,77.47 ccw(c107.399,77.47) 108.462,78.534 ccw(c109.526,79.597) Px.1@109.526,78.093 ; Px.1@109.157,77.47 ccw(c108.266,77.47) 108.896,78.1 ccw(c109.526,78.73) Px.1@109.526,77.839 ; Px.1@109.526,77.47 108.129,78.867 R2.2@103.886,78.867 ; ?.2@114.185,108.077 ccw(c112.681,108.077) 113.744,109.141 ccw(c114.808,110.204) ?.2@114.808,108.7 ; ?.2@114.439,108.077 ccw(c113.548,108.077) 114.178,108.707 ccw(c114.808,109.337) ?.2@114.808,108.446 ; ?.2@114.808,108.077 113.665,109.22 +5V.1@101.346,109.22 +5V.2@98.806,109.22 +5V.3@96.266,109.22 +5V.4@93.726,109.22 93.726,107.315 94.488,106.553 R1.1@94.488,104.013 97.155,104.013 98.044,103.124 C2.2@98.044,101.346 ; 96.393,93.726 96.393,99.695 C2.2@98.044,101.346 ; 96.393,93.726 C4.2@97.409,92.71 102.794,87.325 102.794,79.959 R2.2@103.886,78.867
  Bottom Layer w0.254: KEY.2@80.264,100.584 82.169,100.584 ; KEY.2@80.652,100.202 cw(c81.563,99.306) 81.563,100.584 cw(c81.563,101.862) KEY.2@80.652,100.966 ; KEY.2@80.833,100.024 cw(c82.169,98.709) 82.169,100.584 ; KEY.2@80.833,101.144 ccw(c82.169,102.459) 82.169,100.584 ; R1.1@94.083,103.608 ccw(c93.105,102.63) 93.105,104.013 ccw(c93.105,105.396) R1.1@94.083,104.418 ; R1.1@94.262,103.787 ccw(c93.718,103.243) 93.718,104.013 ccw(c93.718,104.783) R1.1@94.262,104.239 ; R1.1@94.361,104.013 92.075,104.013 91.694,104.394 91.694,105.283 91.059,105.918 84.582,105.918 83.185,104.521 83.185,101.6 82.169,100.584 ; Px.1@109.526,77.47 114.046,77.47 ATMEGA8L/48.7@116.586,80.01 ; Px.1@109.787,77.209 cw(c110.417,76.579) 110.417,77.47 cw(c110.417,78.361) Px.1@109.787,77.731 ; Px.1@109.967,77.029 cw(c111.03,75.966) 111.03,77.47 cw(c111.03,78.974) Px.1@109.967,77.911 ; ATMEGA8L/48.7@115.951,80.01 cw(c114.418,80.01) 115.502,78.926 cw(c116.586,77.842) ATMEGA8L/48.7@116.586,79.375 ; ATMEGA8L/48.7@116.205,80.01 cw(c115.285,80.01) 115.936,79.36 cw(c116.586,78.709) ATMEGA8L/48.7@116.586,79.629
pads on no net: ?.3 J61.1 J61.4 J61.6 J61.7 J61.8 J61.9 J61.10 J61.11 KEY.3 KEY.4 MAX232.7 MAX232.8 MAX232.9 MAX232.10

## Polygon pours and split planes (outlines as drawn)
no net on Top Layer (hatched 45Degree grid 0.508 track 0.203): 64.694,110.186 65.71,111.202 144.069,111.202 144.958,110.313 144.958,57.735 143.942,56.719 143.815,56.592 65.71,56.592 64.821,57.481 64.821,110.186
no net on Bottom Layer (hatched 45Degree grid 0.508 track 0.203): 64.782,110.109 65.671,110.998 65.798,111.125 143.903,111.125 144.919,110.109 144.919,57.785 143.649,56.515 65.798,56.515 64.782,57.531

## Silkscreen, mask and mechanical layers (free items; w line width, h text height)
Top Overlay:
  text "SN:090526" at 131.445,108.204 h1.02
  text "+5V" at 65.151,105.283 h1.22 r270
  text "http://www.ourhc.cn" at 110.109,100.711 h1.52
  text "GND" at 65.151,99.949 h1.22 r270
  text "GND" at 125.857,98.552 h1.02
  text "PD0" at 111.125,98.425 h1.02
  text "PC6" at 125.984,96.139 h1.02
  text "PD1" at 111.125,95.885 h1.02
  text "PC5" at 125.984,93.599 h1.02
  text "PD2" at 111.125,93.472 h1.02
  text "PC4" at 125.984,90.932 h1.02
  text "PD3" at 111.125,90.805 h1.02
  text "PC3" at 125.984,88.392 h1.02
  text "PD4" at 111.125,88.265 h1.02
  text "PC2" at 125.984,85.852 h1.02
  text "PD5" at 111.125,85.725 h1.02
  text "PC1" at 125.984,83.312 h1.02
  text "PD6" at 111.125,83.185 h1.02
  text "PC0" at 125.984,80.772 h1.02
  text "PD7" at 111.125,80.518 h1.02
  text "VCC" at 111.125,76.962 h1.02
  text "PB7" at 125.984,76.708 h1.02
  text "AVCC" at 111.125,74.549 h1.02
  text "PB6" at 125.984,74.295 h1.02
  text "AREF" at 110.998,71.882 h1.02
  text "PB5" at 125.984,71.755 h1.02
  text "GND" at 111.125,69.215 h1.02
  text "PB4" at 125.984,69.088 h1.02
  text "PB3" at 125.984,66.675 h1.02
  text "PB2" at 125.984,64.135 h1.02
  text "PB1" at 125.984,61.468 h1.02
  text "PB0" at 125.984,58.928 h1.02
Mechanical 1:
  lines w0.254: 58.677,110.362 59.182,111.887 ; 58.798,57.657 59.309,56.134 ; 58.928,111.886 59.436,111.888 ; 59.055,56.133 59.563,56.135 ; 59.226,92.669 59.182,111.887 ; 59.265,75.352 59.309,56.134 ; 59.693,110.364 59.182,111.887 ; 59.814,57.659 59.309,56.134 ; 64.262,114.427 64.262,114.935 ; 65.786,114.173 64.262,114.681 ; 65.786,115.189 64.262,114.681 ; 66.802,56.134 144.145,56.134 145.415,57.404 145.415,110.617 144.272,111.76 65.532,111.76 64.262,110.49 64.262,57.277 65.405,56.134 67.31,56.134 ; 97.068,114.681 64.262,114.681 ; 112.609,114.681 145.415,114.681 ; 143.891,114.173 145.415,114.681 ; 143.891,115.189 145.415,114.681 ; 145.415,114.427 145.415,114.935
  text "81.153 (mm)" at 97.322,113.767 h1.52
  text "55.7531 (mm)" at 58.312,92.413 h1.52 r270.13

## Text inside footprints (layer, text, board x,y; h text height)
J61: Top Overlay "6" at 70.253,74.212 h1.5 r90; Top Overlay "9" at 70.253,82.522 h1.5 r90; Top Overlay "5" at 79.653,83.907 h1.5 r90; Top Overlay "1" at 79.653,73.077 h1.5 r90
?: Top Overlay "10" at 126.492,107.569 h1.27; Top Overlay "9" at 126.492,105.029 h1.27; Top Overlay "1" at 112.776,105.029 h1.27; Top Overlay "2" at 112.268,107.569 h1.27